# Altium PCB An.pcbdoc
Units mil, origin at the board's own origin, x right, y up, seen from the top; angles counter-clockwise.
Board outline 4280 x 3700 mil, 2 copper layers (Top Layer, Bottom Layer); 24 components, 31 nets, 124 pads, 8 vias.
Unrouted connection lines stored in the file: 2.
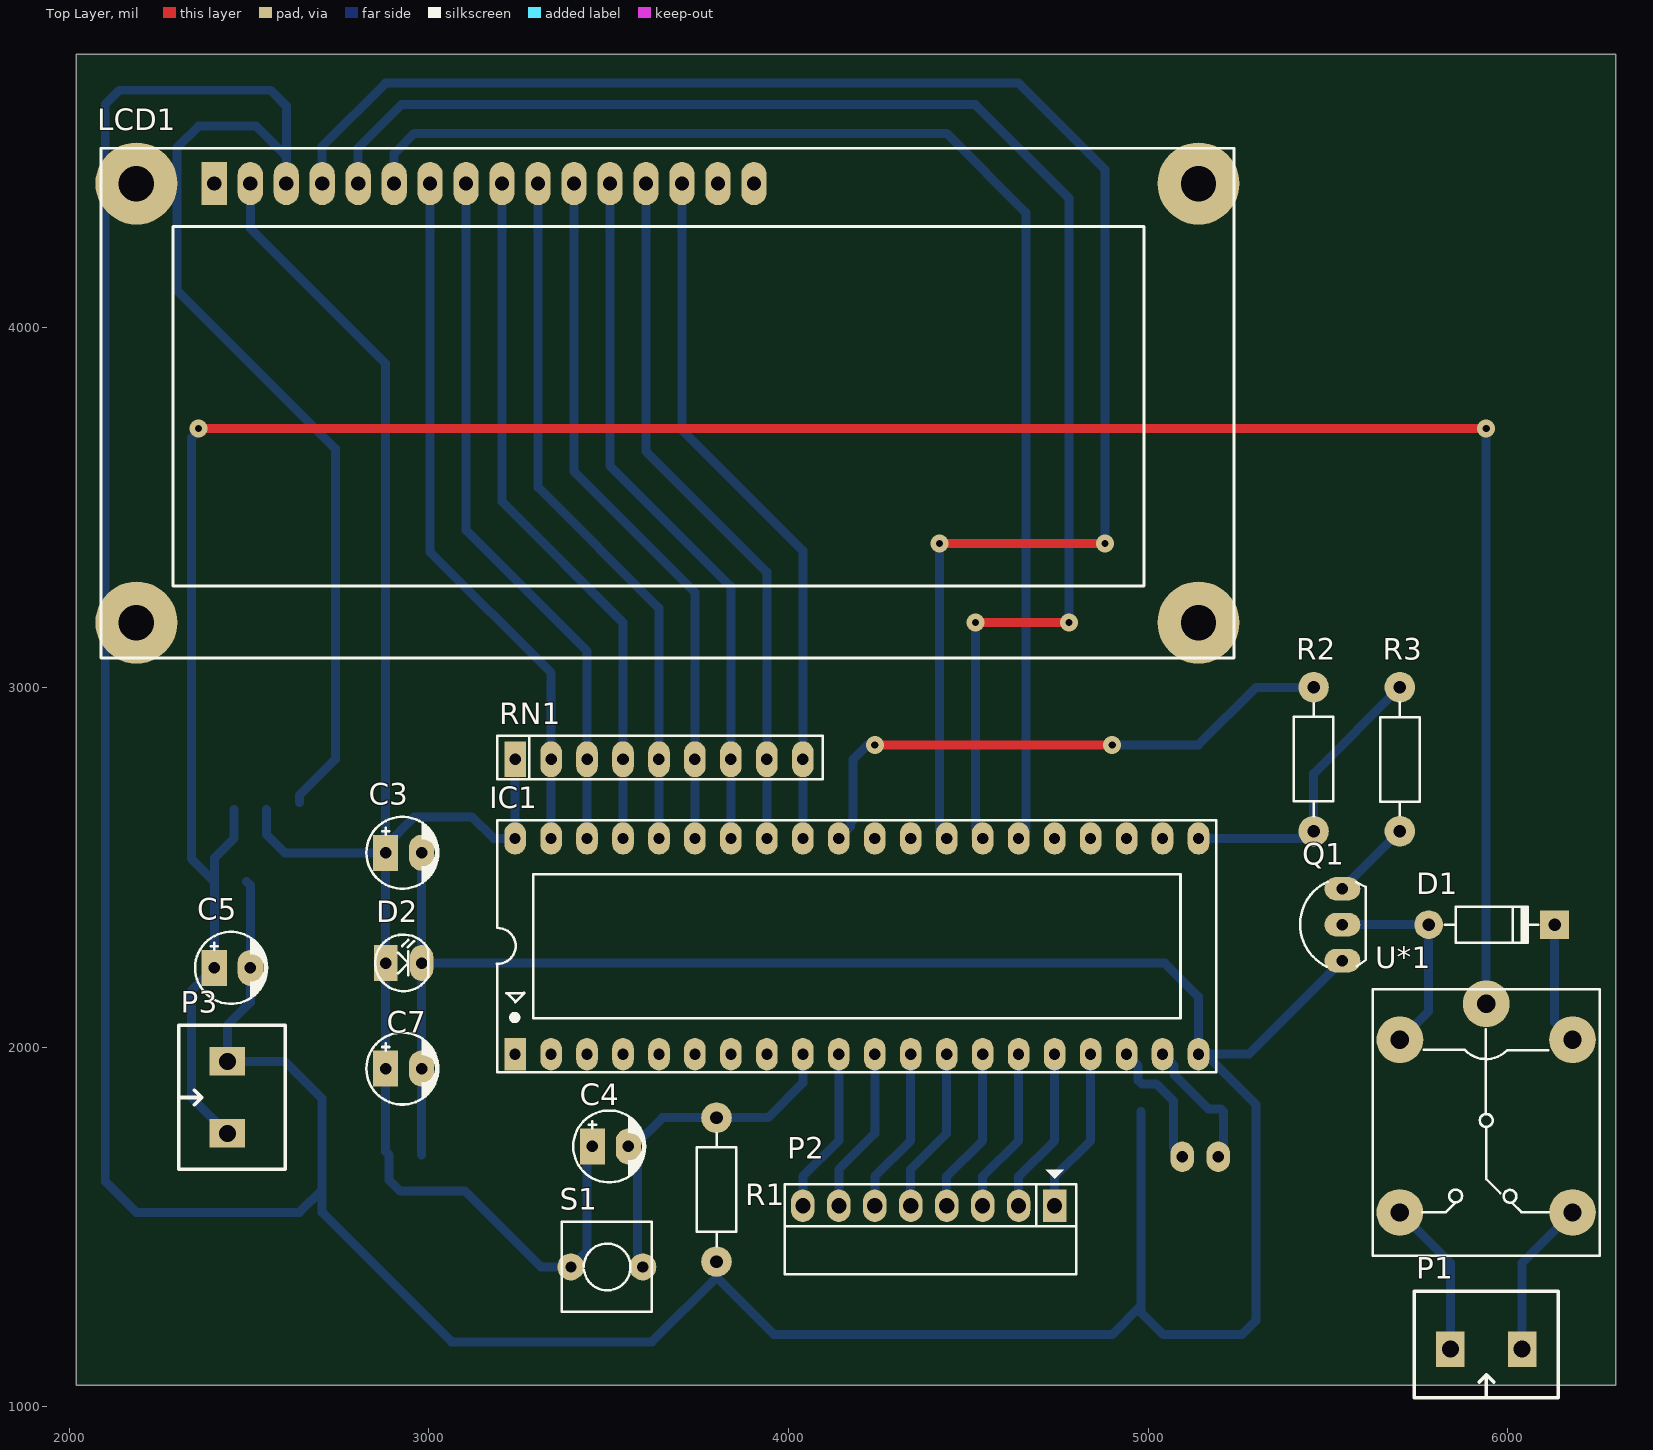
[diagram p0: Top Layer view]
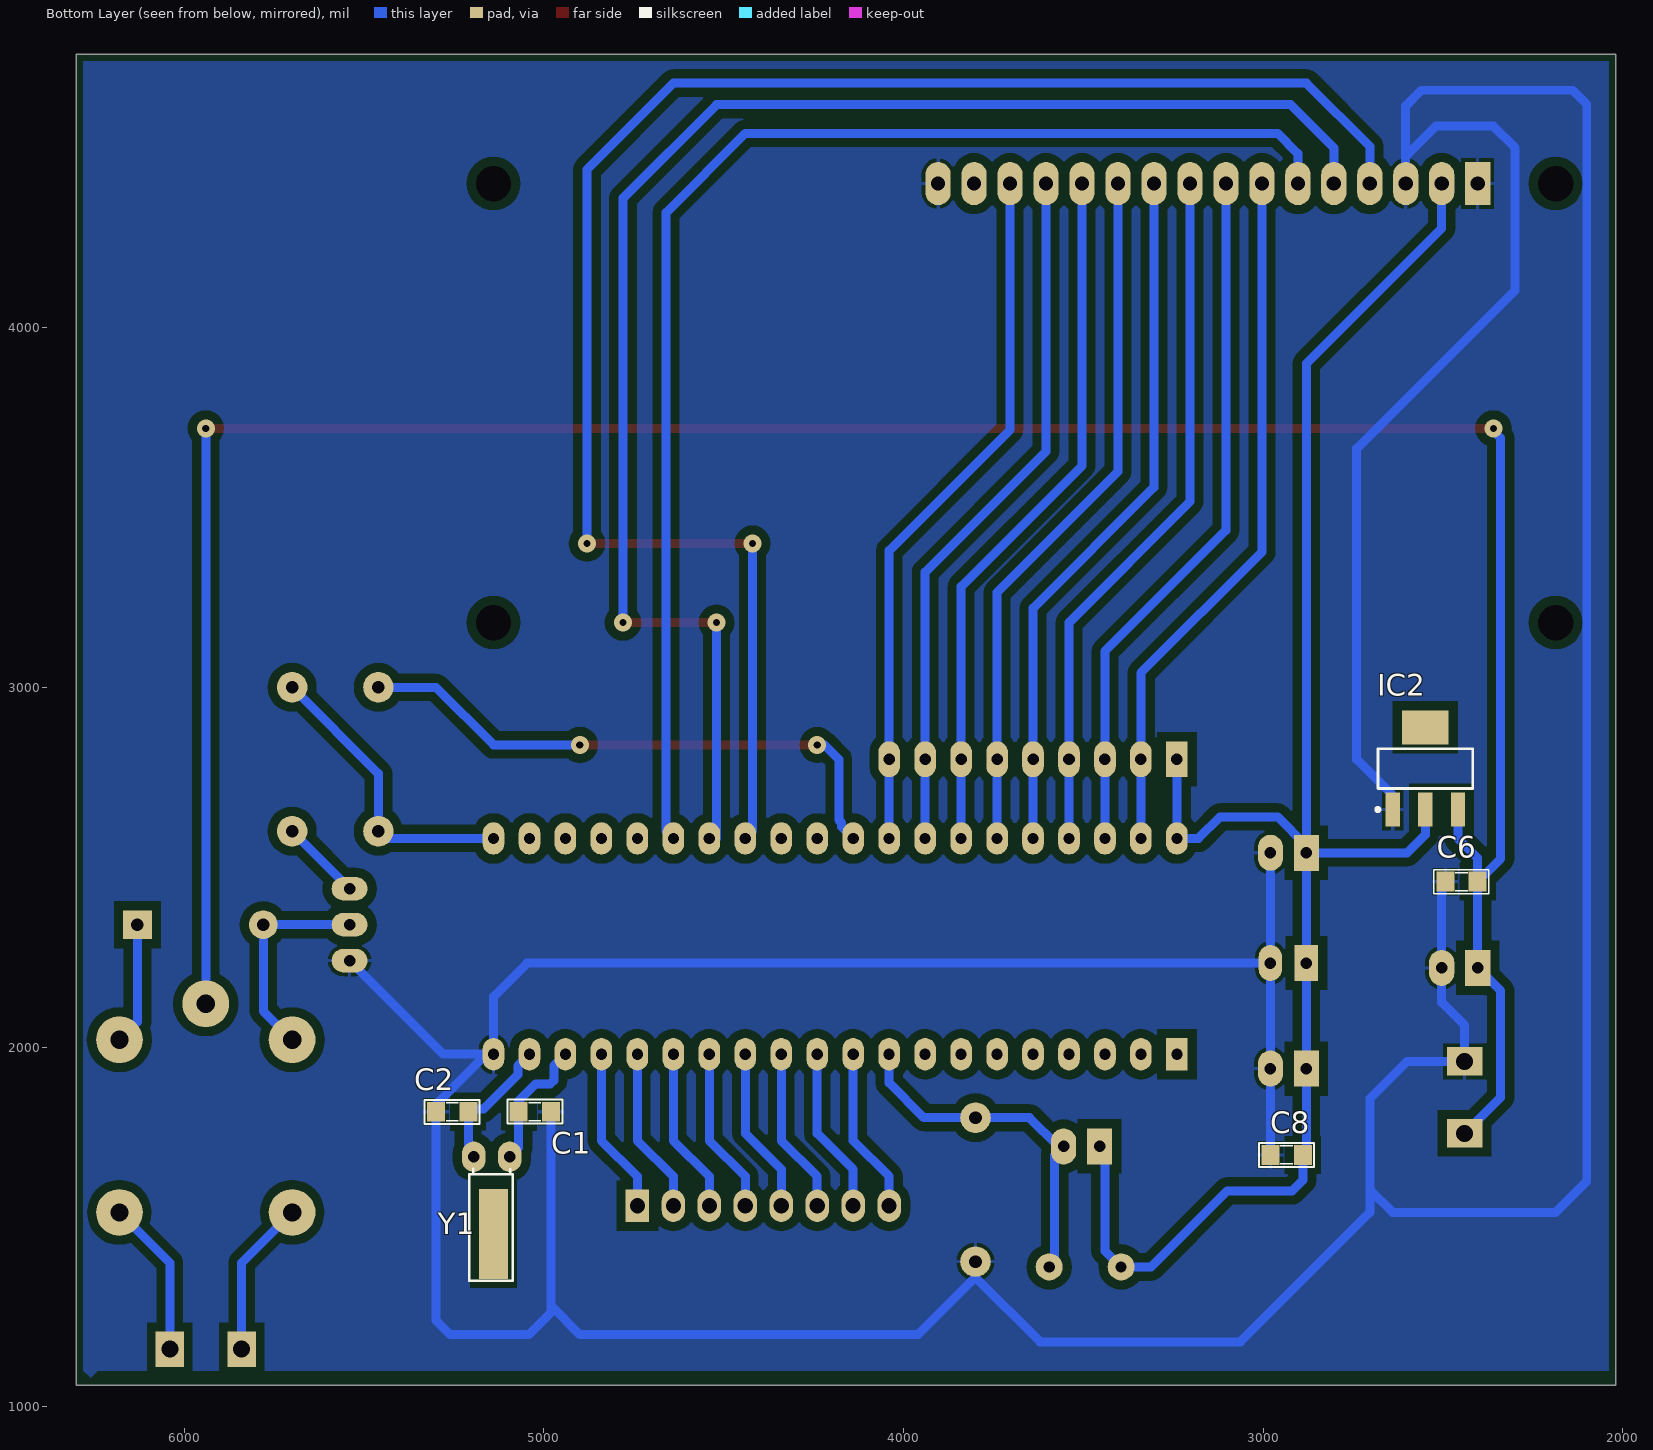
[diagram p1: Bottom Layer view, seen from below]
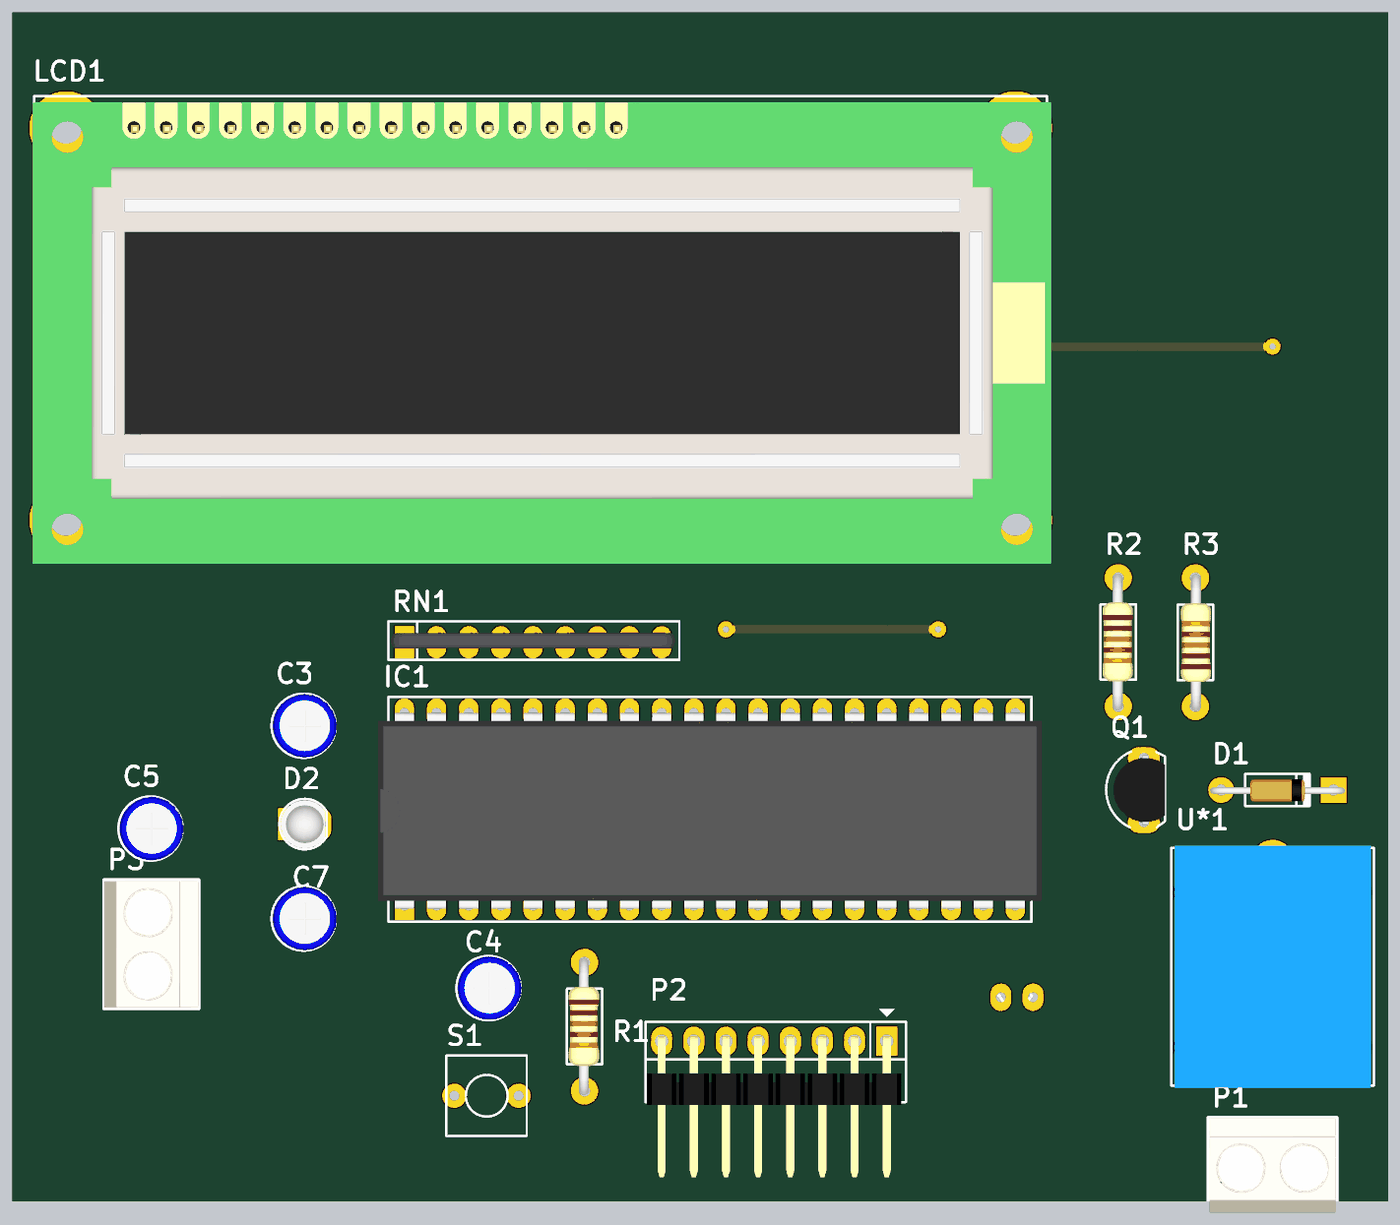
[diagram p2: 3D render of the assembled board from above, using the file's embedded part models]
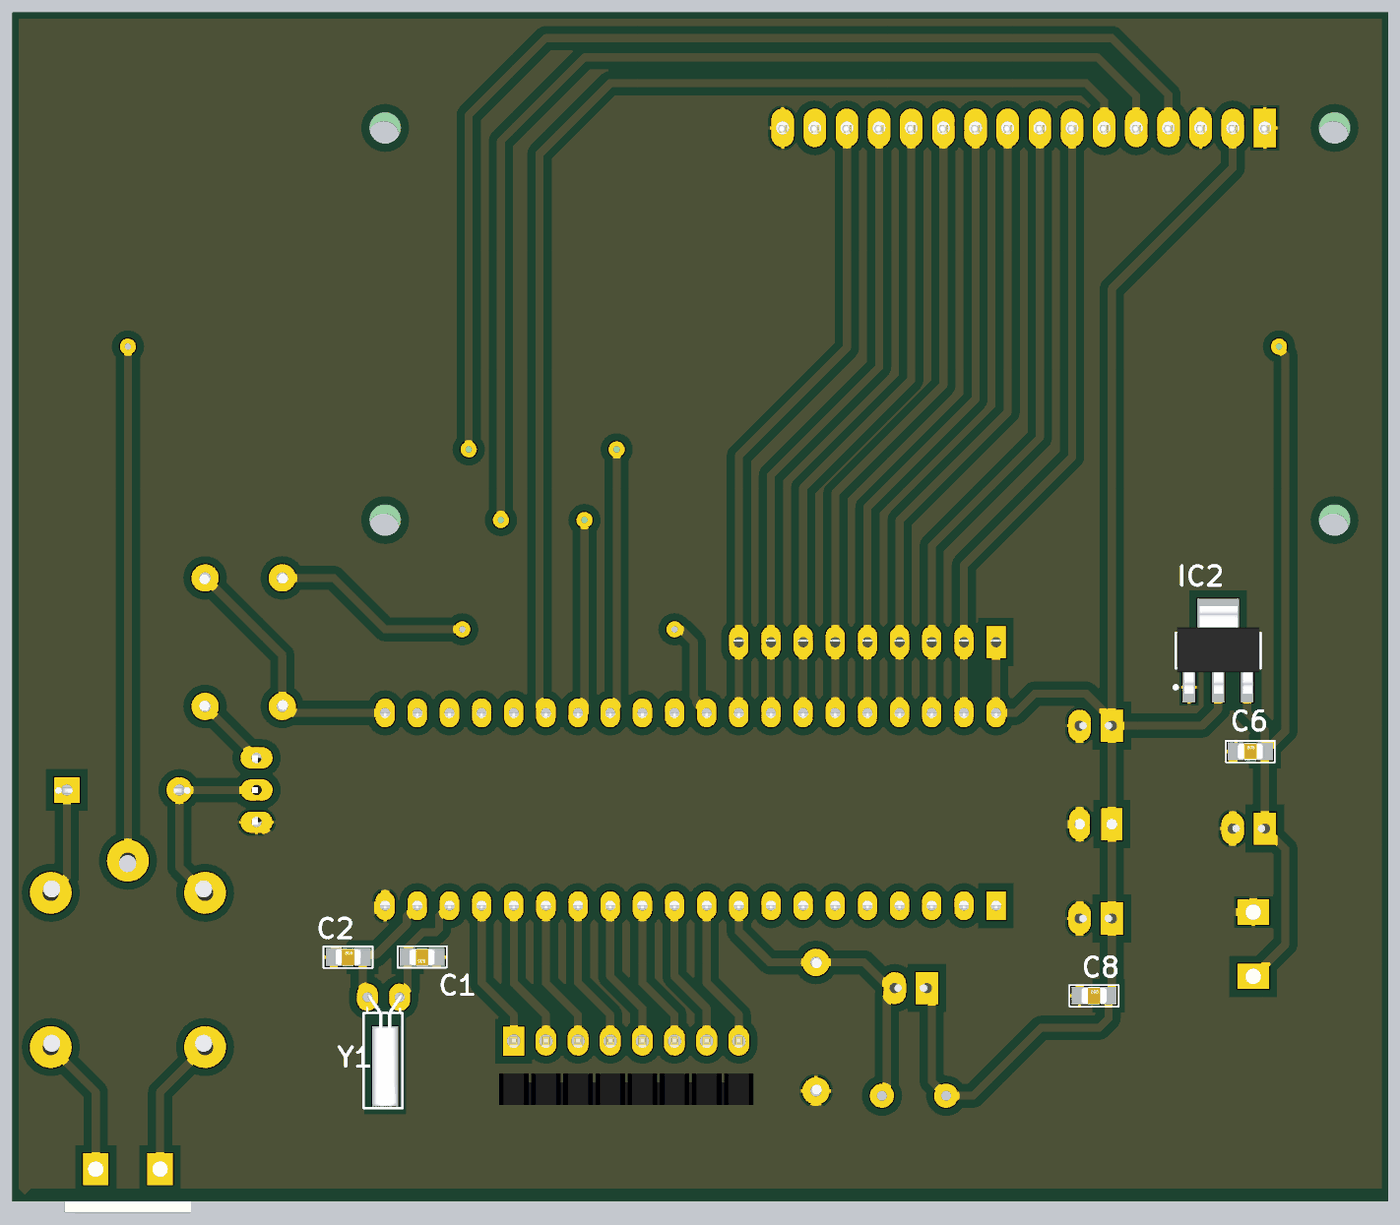
[diagram p3: 3D render of the assembled board from below, using the file's embedded part models]

## Layer stack, top to bottom
Top Solder: solder mask 0.4, Solder Resist, Dk 3.5
Top Layer: signal copper 1.4
Dielectric 1: dielectric 12.6, FR-4, Dk 4.8
Bottom Layer: signal copper 1.4
Bottom Solder: solder mask 0.4, Solder Resist, Dk 3.5

## Board outline
2020,1060 2020,4760 6300,4760 6300,1060

## Design rules (kind name [scope] priority, off if disabled: settings)
Clearance [All] p1: gap=25 ignorepadtopadclearanceinfootprint=FALSE
PlaneConnect [All] p1: planeconnectstyle=Relief reliefexpansion=25 reliefentries=4 reliefconductorwidth=20 reliefairgap=20
PolygonConnect [All] p1: connectstyle=Relief reliefconductorwidth=10 reliefentries=4 polygonreliefangle="90 Angle" airgapwidth=10
RoutingVias [All] p1: holewidth=20 width=50 viastyle="Through Hole" minholewidth=20 minwidth=50 maxholewidth=35 maxwidth=50
SolderMaskExpansion [All] p1: expansion=4
Width [All] p1: maxlimit=30 minlimit=25 preferedwidth=25
29 further rules are at their usual default settings.

## Components (designator, comment, footprint, x,y, rotation, side; value= is the part's Value field where it differs from the comment)
C1 "Cap Non-Pol SMD" CAP-SM-0805 4980,1820 r0 bottom value=33pF
C2 "Cap Non-Pol SMD" CAP-SM-0805 5300,1820 r180 bottom value=33pF
C3 "Cap Pol" CP1/2 2880,2540 r0 top value=0.1uF
C4 "Cap Pol" CP1/2 3455,1723.5 r0 top value=10uF/10V
C5 "Cap Pol" CP1/2 2403.78,2220 r0 top value=220uF
C6 "Cap Non-Pol SMD" CAP-SM-0805 2493.78,2460 r180 bottom value=100nF
C7 "Cap Pol" CP1/2 2880,1940 r0 top value=220uF
C8 "Cap Non-Pol SMD" CAP-SM-0805 2980,1700 r180 bottom value=100nF
D1 "1N4007" D1A 5780,2340 r180 top
D2 "LED" LED-3mm 2880,2233.5 r0 top
IC1 "AT89C52" DIP40/W0.6 3240,1980 r0 top
IC2 "LM1117" SOT223-4N 2549.45,2774.17 r90 bottom value=LM317
LCD1 "LCD16x2A" LCD16X2 2403.78,4400.47 r0 top
P1 "Domino 2" "DOMINO 2- 5mm" 5940,1160 r180 top
P2 "Header 8H" JP8H 4740,1558.5 r180 top
P3 "Domino 2" "DOMINO 2- 5mm" 2440,1860 r90 top
Q1 "BC548" QTO-92 5540,2340 r90 top
R1 "RESISTOR" "RES 1/2W" 3800,1403.5 r90 top value=8.2K
R2 "RESISTOR" "RES 1/2W" 5460,2600 r90 top value=10K
R3 "RESISTOR" "RES 1/2W" 5700,3000 r270 top value=100
RN1 "10K" RN8 3240,2800 r0 top value="Tro thanh 10K"
S1 "Tact SW - 2Pin" SW2 3595,1388.5 r180 top
U*1 "RELAY" RL_SPDT_10A 5940,2120 r270 top
Y1 "XTAL" "XTAL 32KN" 5195,1695 r270 bottom

## Footprints (in the part's own frame and the unit in brackets; to place one, negate y for a bottom-side part, rotate by r counter-clockwise, add the part's x,y. Pads: shape width x height; smd on the part's side, far side on the other; paste and mask are expansions set on the pad)
CAP-SM-0805 [mil]
  rect 50x55 smd: 1(0,0) 2(90,0)
  silkscreen extent -32,-34 121,33, body extent 6,-25 84,25, height 31
CP1/2 [mil] "Tu hoa < 22uF/16>50V"
  rect 70x100 hole 32: 1(0,0)
  oval 70x100 hole 32: 2(100,0)
  silkscreen extent -53,-100 147,100, body extent -49,-99 149,99, height 287
D1A [mil] "Diode 1N4007, W 100mil, L 350mil"
  round 80 hole 35: 1(0,0)
  rect 80x80 hole 35: 2(-350,0)
  silkscreen extent -305,-50 -45,50, body extent -386,-33 34,36, height 84
DIP40/W0.6 [mil] "40 PIN, W 600mil, Pin to pin 100mil"
  rect 60x90 hole 31: 1(0,0)
  oval 60x90 hole 31: 2(100,0) 3(200,0) 4(300,0) 5(400,0) 6(500,0) 7(600,0) 8(700,0) 9(800,0) 10(900,0) 11(1000,0) 12(1100,0) 13(1200,0) 14(1300,0) 15(1400,0) 16(1500,0) 17(1600,0) 18(1700,0) 19(1800,0) 20(1900,0) 21(1900,600) 22(1800,600) 23(1700,600) 24(1600,600) 25(1500,600) 26(1400,600) 27(1300,600) 28(1200,600) 29(1100,600) 30(1000,600) 31(900,600) 32(800,600) 33(700,600) 34(600,600) 35(500,600) 36(400,600) 37(300,600) 38(200,600) 39(100,600) 40(0,600)
  silkscreen extent -50,-50 1950,650, body extent -82,-10 1982,600, height 224
"DOMINO 2- 5mm" [mm]
  rect 2x2.5 hole 1.2: 1(-2.54,0) 2(2.54,0)
  silkscreen extent -5.08,-4.08 5.08,3.43, body extent -5,-4.07 5,3.43, height 10
JP8H [mil]
  rect 65x90 hole 42: 1(0,0)
  oval 65x90 hole 42: 2(100,0) 3(200,0) 4(300,0) 5(400,0) 6(500,0) 7(600,0) 8(700,0)
  silkscreen extent -60,-100 750,190, body extent -46,-15 746,424, height 49
LCD16X2 [mm] "LCD dipslay 16x2, 16 pin"
  rect 1.778x3.048 hole 1: 1(0,0)
  oval 1.778x3.048 hole 1: 2(2.54,0) 3(5.08,0) 4(7.62,0) 5(10.16,0) 6(12.7,0) 7(15.24,0) 8(17.78,0) 9(20.32,0) 10(22.86,0) 11(25.4,0) 12(27.94,0) 13(30.48,0) 14(33.02,0) 15(35.56,0) 16(38.1,0)
  round 5.8 / inner round 0 / far side round 0 hole 2.5 unplated: M1(-5.5,0) M2(69.5,0) M3(-5.5,-31) M4(69.5,-31)
  silkscreen extent -8,-33.5 72,2.5, body extent -8.13,-34.47 72.37,2.03, height 18.14
LED-3mm [mil] "LED 2 PIN, 3ly Only colour"
  rect 65x100 hole 32: 1(0,0)
  oval 65x100 hole 32: 2(100,0)
  silkscreen extent -29,-78 118,79, body extent -25,-75 113,75, height 217
QTO-92 [mil] "TO-92"
  oval 66x100 hole 32: 1(-100,0) 2(0,0) 3(100,0)
  silkscreen extent -117,-65 120,118, body extent -109,-66 109,95, height 245
"RES 1/2W" [mil] "R 1/2W, 2 pin, 300mil"
  round 85 hole 35: 1(0,0) 2(400,0)
  silkscreen extent 42,-55 356,55, body extent -12,-45 414,49, height 91
RL_SPDT_10A [mil] "Relay SPDT, 5 pin, 10A,W 650mil, L 800mil, H 800mil"
  round 130 hole 51: 1(100,240) 2(100,-240) 3(0,0) 4(580,-240) 5(580,240)
  silkscreen extent -40,-315 700,315, body extent -46,-304 706,306, height 602
RN8 [mil] "R SIP8, 9 Pin"
  rect 60x100 hole 32: 1(0,0)
  oval 60x100 hole 32: 2(100,0) 3(200,0) 4(300,0) 5(400,0) 6(500,0) 7(600,0) 8(700,0) 9(800,0)
  silkscreen extent -50,-55 855,65, body extent -43,-20 843,29, height 219
SOT223-4N [mm] "SOT223, 4-Leads, Body 6.5x3.5mm, Pitch 2.3mm, Lead Span 7mm, IPC Medium Density"
  rect 2.4x1 smd: 1(-2.9,2.3) 2(-2.9,0) 3(-2.9,-2.3)
  rect 2.4x3.3 smd: 4(2.9,0)
  silkscreen extent -3.02,-3.35 1.4,3.48, body extent -3.39,-3.27 3.5,3.23, height 1.72
SW2 [mil] "SW button 2pin, 250x 250 mil"
  round 75 hole 31: 1(0,0) 2(200,0)
  silkscreen extent -25,-125 225,125
"XTAL 32KN" [mil] "Crystal for 32,768kHz, 2pin"
  oval 85x65 hole 31: 1(0,0) 2(0,100)
  rect 250x80 smd: 3(215,55)
  silkscreen extent 34,-12 345,109, body extent -11,-1 339,111, height 79

## Part data
C1 C2 C6 C8: "Capacitor"
C3 C4 C5 C7: "Polarized Capacitor (Radial)"
D1: library part Diode, "Default Diode"
IC1: "Atmel AT89C52, 8k Byte Flash Memory , 40 Pin"
IC2: "Available in 1.8V, 2.5V, 2.85V, 3.3V, 5V, and  Adjustable Versions"
LCD1: library part LCD16x2, "LCD dipslay 16 char, 2 line"
P1 P3: "Domino, 2-Pin", LatestRevisionDate=17-Jul-2002, LatestRevisionNote="Re-released for DXP Platform.", Publisher="Altium Limited"
P2: "Header, 8-Pin, Right Angle", LatestRevisionDate=17-Jul-2002, LatestRevisionNote="Re-released for DXP Platform.", Publisher="Altium Limited"
Q1: library part C1815, "NPN Bipolar Transistor"
R1 R2 R3: "Resistor"
RN1: library part RN8, "Resistor 8 (Thanh)"
S1: "Switch button 2 pin"
U*1: "Relay 10A"
Y1: "Crystal Oscillator", LatestRevisionDate=17-Jul-2002, LatestRevisionNote="Re-released for DXP Platform.", PackageDescription="Crystal, Thru-Hole; 2 Leads; Body 3.1 x 8.2 mm (Dia.xH)", PackageReference=R38, Published=8-Jun-2000, Publisher="Altium Limited"

## Via types
v1: diameter 50, hole 20, Top Layer to Bottom Layer, 8 vias

## Nets (pads, with @x,y where several pads share a name; then routed paths per layer and width w, separated by ;. In a path a pad name is that pad's centre, name@x,y a point inside that pad or via, vN(x,y) a via of type N, cw(c..) or ccw(c..) an arc to the next point about the centre after c; other vN are vias at no path point)
5V: C3.1 C4.1 C7.1 C8.2 D2.1 IC1.31 IC1.40 IC2.2 LCD1.2 R2.2 RN1.1 S1.2 | length 6582.1
  Top Layer w25: v1(4240,2840) v1(4900,2840)
  Bottom Layer w25: LCD1.2 2503.78,4276.22 2880,3900 C3.1@2880,2560 ; IC2.2 2549.45,2590.55 2600,2540 C3.1 ; C7.1@2900,1940 C7.1@2880,1960 ; RN1.1 IC1.40 3180,2580 3120,2640 2960,2640 C3.1@2880,2560 ; C4.1 3440,1708.5 3440,1433.5 S1.2 3311.5,1388.5 3100,1600 2919.82,1600 2890,1629.82 C8.2 2880,1710 C7.1 C7.1@2880,1960 ; IC1.31 4172.5,2612.5 4172.5,2622.96 4180,2630.46 4180,2800 4220,2840 v1(4240,2840) ; v1(4900,2840) 5140,2840 5300,3000 R2.2 ; C7.1@2880,1960 D2.1 C3.1 ; C3.1 C3.1@2880,2560
12V: C5.1 C6.2 IC2.3 P3.1 U*1.3 | length 7465.4
  Top Layer w25: v1(2360,3720) v1(5940,3720)
  Bottom Layer w25: v1(2360,3720) 2360,3713.01 2340,3693.01 2340,2523.78 C6.2 ; P3.1 2340,1860 2340,2156.22 C5.1 C6.2 ; IC2.3 2458.9,2580 2403.78,2524.88 C6.2 ; U*1.3 v1(5940,3720)
C1: IC1.14 P2.4 | length 462.9
  Bottom Layer w25: P2.4 4440,1640 4540,1740 IC1.14
C2: IC1.15 P2.3 | length 462.9
  Bottom Layer w25: P2.3 4540,1640 4640,1740 IC1.15
C3: IC1.16 P2.2 | length 462.9
  Bottom Layer w25: P2.2 4640,1640 4740,1740 IC1.16
C4: IC1.17 P2.1 | length 462.9
  Bottom Layer w25: P2.1 4740,1640 4840,1740 IC1.17
Control: IC1.21 R2.1 R3.1 | length 827.7
  Bottom Layer w25: IC1.21 5440,2580 R2.1 5460,2760 R3.1
D0: IC1.39 LCD1.7 RN1.2 | length 1959.7
  Bottom Layer w25: LCD1.7 3003.78,3376.22 3340,3040 RN1.2 IC1.39
D1: IC1.38 LCD1.8 RN1.3 | length 1959.7
  Bottom Layer w25: LCD1.8 3103.78,3436.22 3440,3100 RN1.3 IC1.38
D2: IC1.37 LCD1.9 RN1.4 | length 1959.7
  Bottom Layer w25: LCD1.9 3203.78,3516.22 3540,3180 RN1.4 IC1.37
D3: IC1.36 LCD1.10 RN1.5 | length 1959.7
  Bottom Layer w25: LCD1.10 3303.78,3556.22 3640,3220 RN1.5 IC1.36
D4: IC1.35 LCD1.11 RN1.6 | length 1959.7
  Bottom Layer w25: LCD1.11 3403.78,3600 3740,3263.78 RN1.6 IC1.35
D5: IC1.34 LCD1.12 RN1.7 | length 1959.7
  Bottom Layer w25: LCD1.12 3503.78,3616.22 3840,3280 RN1.7 IC1.34
D6: IC1.33 LCD1.13 RN1.8 | length 1959.7
  Bottom Layer w25: LCD1.13 3603.78,3656.22 3940,3320 RN1.8 IC1.33
D7: IC1.32 LCD1.14 RN1.9 | length 1959.7
  Bottom Layer w25: LCD1.14 3703.78,3716.22 4040,3380 RN1.9 IC1.32
E: IC1.26 LCD1.6 | length 3702.2
  Bottom Layer w25: LCD1.6 2903.78,4483.78 2960,4540 4440,4540 4660,4320 4660,2600 IC1.26
GND: C1.1 C2.1 C3.2 C5.2 C6.1 C7.2 C8.1 D2.2 IC1.20 IC2.1 LCD1.1 LCD1.3 LCD1.16 P3.2 Q1.1 R1.1 | length 16040.6
  Bottom Layer w25: C6.1 2503.78,2450 C5.2 2503.78,2123.78 2440,2060 P3.2 2600,1960 2703.78,1856.22 2703.78,1603.78 ; LCD1.3 2603.78,4476.22 ; IC2.1@2640,2680 2640,2700 2740,2800 2740,3663.78 2300,4103.78 2300,4500 2360,4560 2520,4560 2603.78,4476.22 ; C8.1 C7.2 D2.2 ; C3.2 D2.2 ; R1.1 3800,1360 ; C1.1 4980,1280 ; Q1.1 5280,1980 IC1.20@5160,1980 ; 2603.78,4476.22 2603.78,4616.22 2560,4660 2140,4660 2100.53,4620.53 2100.53,1626.71 2187.24,1540 2640,1540 2703.78,1603.78 ; 2703.78,1603.78 2703.78,1540 3063.78,1180 3620,1180 3800,1360 ; D2.2 5046.5,2233.5 5140,2140 IC1.20 IC1.20@5160,1980 ; 3800,1360 3960,1200 4900,1200 4980,1280 ; 4980,1280 4980,1262.5 5042.5,1200 5260,1200 5300,1240 C2.1 5300,1840 IC1.20@5160,1980
NetD1_1: D1.1 Q1.2 U*1.2 | length 593.1
  Bottom Layer w25: Q1.2 D1.1 5780,2100 U*1.2
NetD1_2: D1.2 U*1.1 | length 340.7
  Bottom Layer w25: D1.2 6130,2070 U*1.1
NetP1_1: P1.1 U*1.5 | length 438
  Bottom Layer w25: P1.1 6040,1400 U*1.5
NetP1_2: P1.2 U*1.4 | length 438
  Bottom Layer w25: U*1.4 5840,1400 P1.2
NetQ1_3: Q1.3 R3.2 | length 226.3
  Bottom Layer w25: Q1.3 R3.2
R1: IC1.10 P2.8 | length 462.9
  Bottom Layer w25: P2.8 4040,1640 4140,1740 IC1.10
R2: IC1.11 P2.7 | length 462.9
  Bottom Layer w25: P2.7 4140,1660 4240,1760 IC1.11
R3: IC1.12 P2.6 | length 462.9
  Bottom Layer w25: P2.6 4240,1640 4340,1740 IC1.12
R4: IC1.13 P2.5 | length 462.9
  Bottom Layer w25: P2.5 4340,1660 4440,1760 IC1.13
RS: IC1.28 LCD1.4 | length 4780.2
  Top Layer w25: v1(4420,3400) v1(4880,3400)
  Bottom Layer w25: LCD1.4 2703.78,4503.78 2880,4680 4640,4680 4880,4440 v1(4880,3400) ; v1(4420,3400) 4420,2600 IC1.28
RST: C4.2 IC1.9 R1.2 S1.1 | length 989.7
  Bottom Layer w25: S1.1 3580,1403.5 3580,1698.5 C4.2 3570,1723.5 3650,1803.5 R1.2 3943.5,1803.5 4040,1900 IC1.9
RW: IC1.27 LCD1.5 | length 4273.1
  Top Layer w25: v1(4520,3180) v1(4780,3180)
  Bottom Layer w25: LCD1.5 2803.78,4500 2923.78,4620 4520,4620 4780,4360 v1(4780,3180) ; IC1.27@4520,2580 v1(4520,3180)
XTAL1: C1.2 IC1.18 Y1.2 | length 372.6
  Bottom Layer w25: IC1.18 4972.5,1947.5 4972.5,1907.5 4982.5,1897.5 5022.5,1897.5 5070,1850 C1.2 5070,1720 Y1.2
XTAL2: C2.2 IC1.19 Y1.1 | length 381.8
  Bottom Layer w25: IC1.19 5072.5,1947.5 5072.5,1923.03 5168.21,1827.32 5202.68,1827.32 C2.2 5210,1710 Y1.1
pads on no net: IC1.1 IC1.2 IC1.3 IC1.4 IC1.5 IC1.6 IC1.7 IC1.8 IC1.22 IC1.23 IC1.24 IC1.25 IC1.29 IC1.30 IC2.4 LCD1.15 LCD1.M1 LCD1.M2 LCD1.M3 LCD1.M4 Y1.3

## Polygon pours and split planes (outlines as drawn)
no net on Drill Drawing (solid): 2020,4760
GND on Bottom Layer "Bottom Layer-GND" (solid, pour order 19): 2040,4740 6280,4740 6280,1100 6260,1080 6240,1100 2040,1100

## Silkscreen, mask and mechanical layers (free items; w line width, h text height)
Drill Drawing:
  the board outline again, w25